# Altium PCB Drofnats.PcbDoc
Units mm, origin at the board's own origin, x right, y up, seen from the top; angles counter-clockwise.
Board outline 76.2 x 76.2 mm, 2 copper layers (Top Layer, Bottom Layer), stack 1.569 mm thick; 8 components, 12 nets, 36 pads, 18 vias.
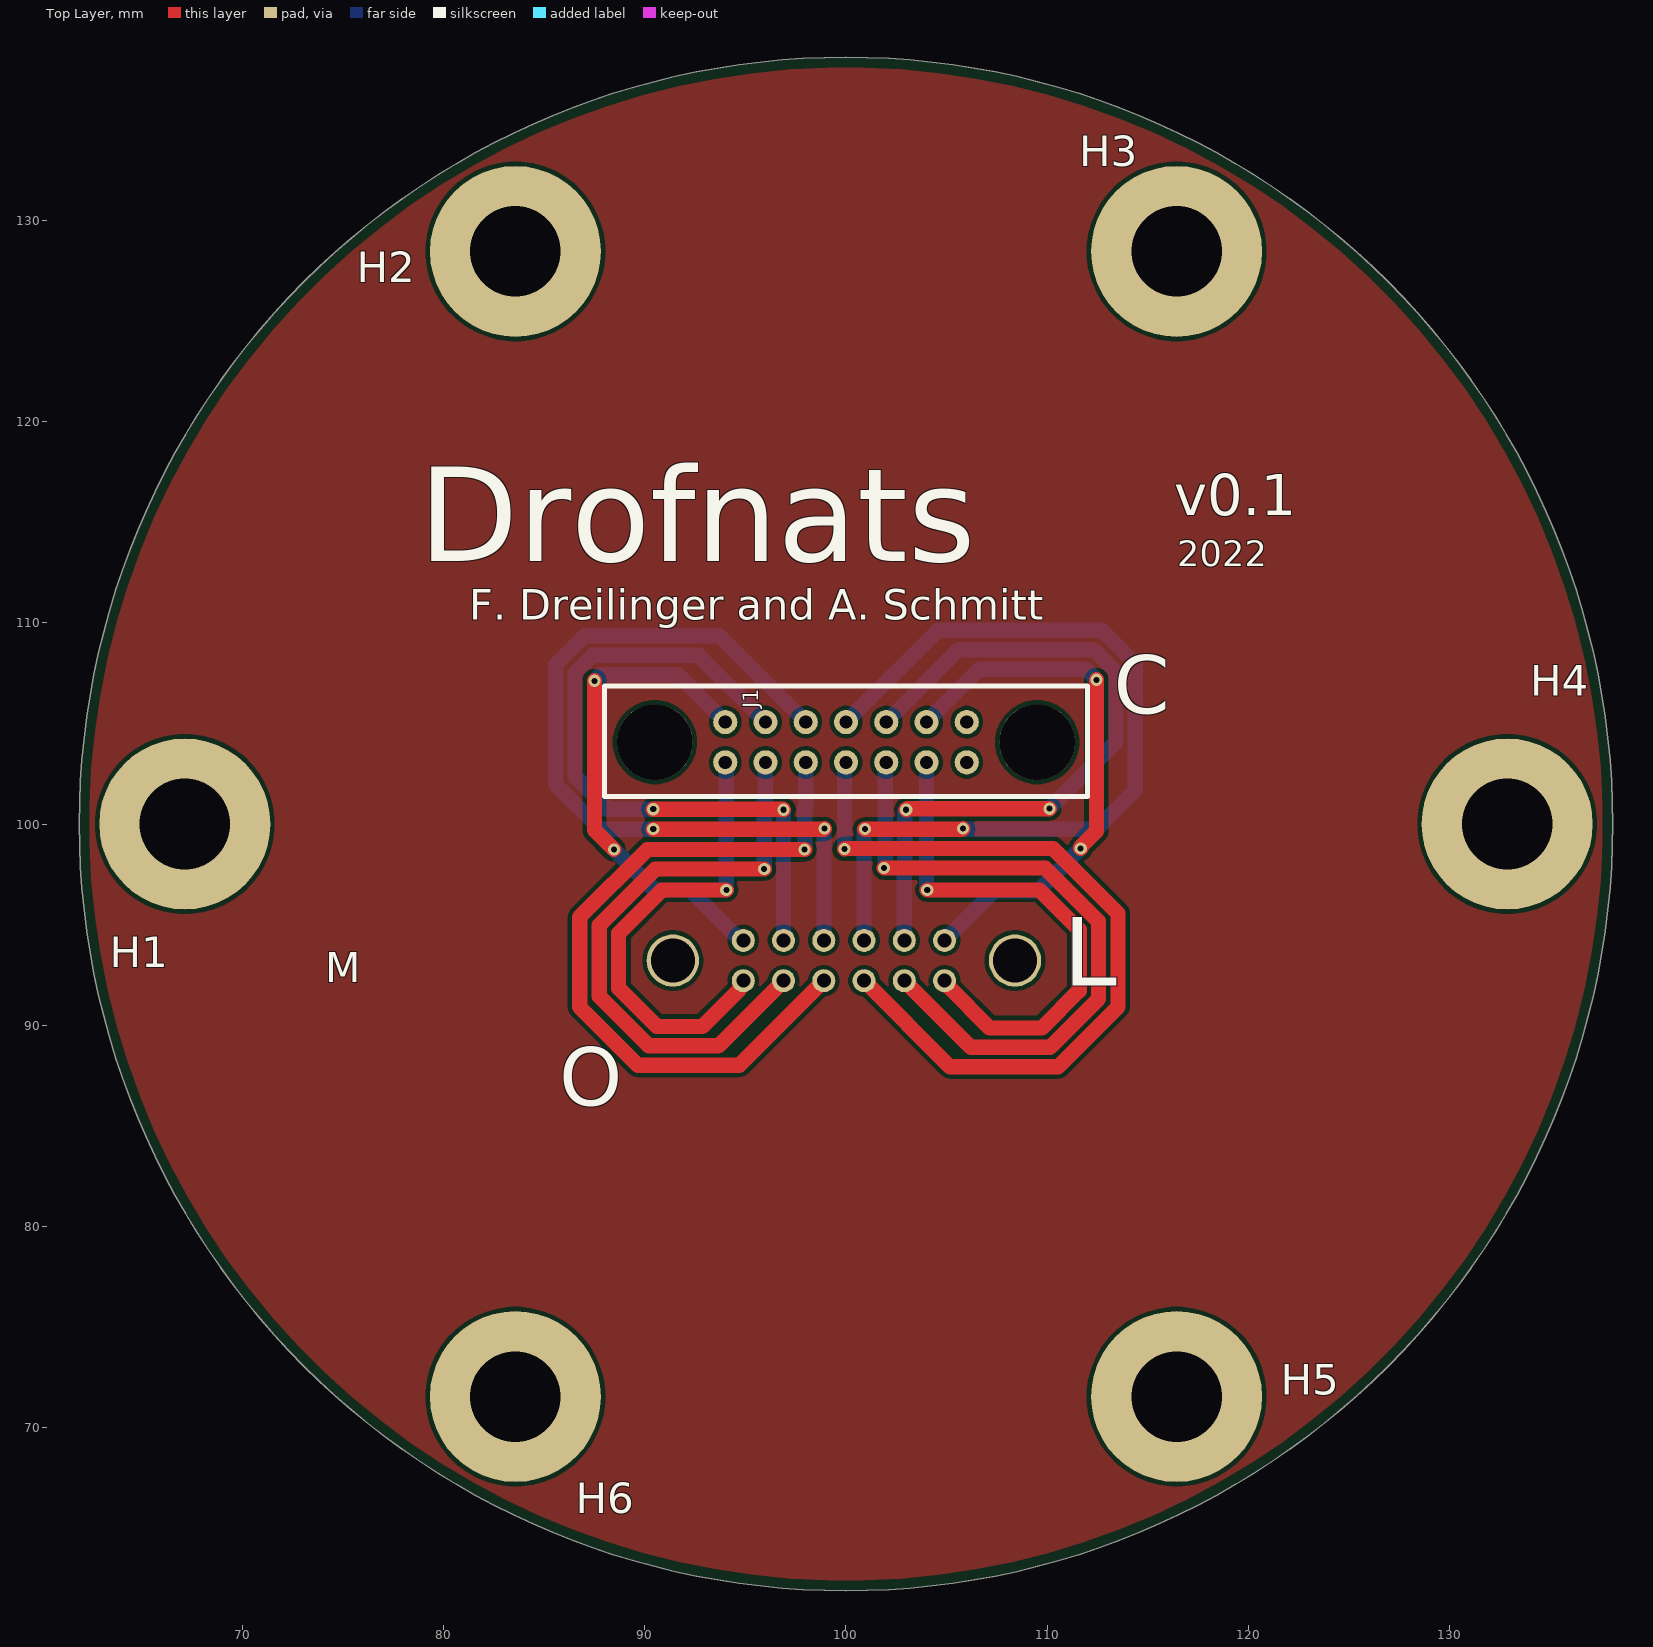
[diagram p0: Top Layer view]
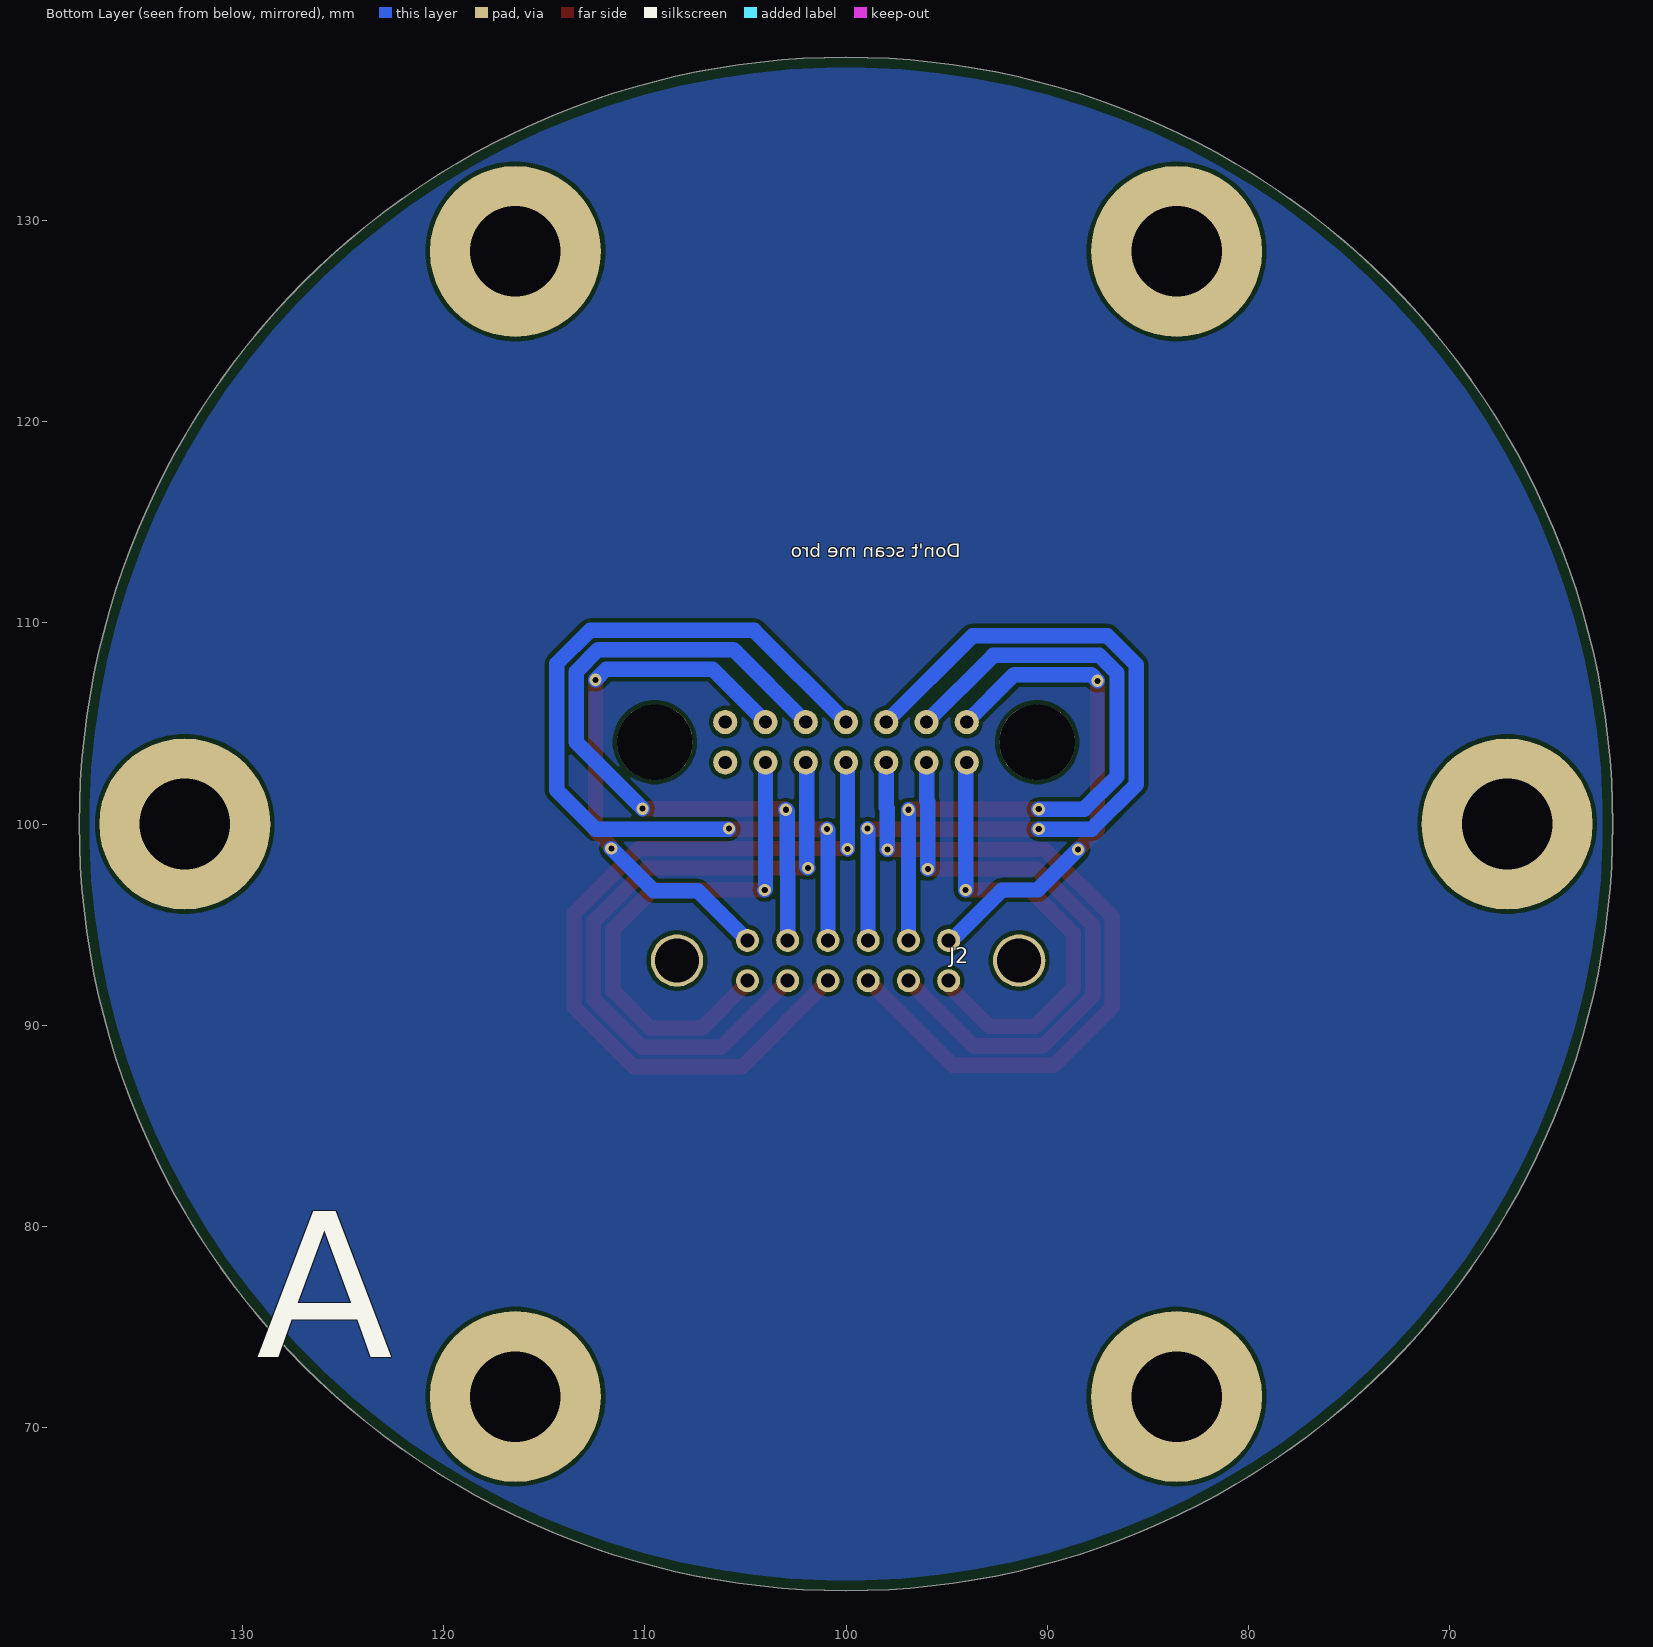
[diagram p1: Bottom Layer view, seen from below]

## Layer stack, top to bottom
Top Solder: solder mask 0.0254, SM-001, Dk 4
Top Layer: signal copper 0.035
Dielectric 1: core 1.4986, Core-043, Dk 4.3
Bottom Layer: signal copper 0.035
Bottom Solder: solder mask 0.0254, SM-001, Dk 4

## Board outline
100,61.9 cw(c100,100) 61.9,100 cw(c100,100) 100,138.1 cw(c100,100) 138.1,100 cw(c100,100)

## Design rules (kind name [scope] priority, off if disabled: settings)
BoardOutlineClearance [( Not OnLayer('Bottom Overlay')) AND ( Not OnLayer('Top Overlay'))] p1: gap=0.508 ignorepadtopadclearanceinfootprint=FALSE except(0: Arc-SplitContinuation Track-SplitContinuation SMDPad-SplitContinuation THPad-SplitContinuation Via-SplitContinuation Fill-SplitContinuation Poly-SplitContinuation Region-SplitContinuation Text-SplitContinuation)
Clearance [All] p1: gap=0.203 ignorepadtopadclearanceinfootprint=TRUE except(0: Arc-Hole Track-Hole SMDPad-Hole THPad-Hole Via-Hole Fill-Hole Poly-Hole Region-Hole Text-Hole; 0.152: Arc-Text Track-Text SMDPad-Text THPad-Text Via-Text Fill-Text Poly-Text Region-Text Text-Text)
DiffPairsRouting [All] p1: maxlimit=0.254 minlimit=0.127 mostfreqgap=0.254 toplayer_minwidth=0.127 toplayer_maxwidth=0.381 toplayer_prefwidth=0.254 bottomlayer_minwidth=0.127 bottomlayer_maxwidth=0.381 bottomlayer_prefwidth=0.254 maxuncoupledlength=12.7
HoleSize [All] p1: absolutevalues=TRUE maxlimit=25.4 minlimit=0.254 maxpercent=80.000 minpercent=20.000
MinimumAnnularRing [All] p1: minimumring=0.152
MinimumSolderMaskSliver [All] p1: minsoldermaskwidth=0
PlaneConnect [All] p1: planeconnectstyle=Direct reliefexpansion=0.508 reliefentries=4 reliefconductorwidth=0.254 reliefairgap=0.254
PolygonConnect PolygonConnect_3 [All vs IsNamedPolygon('BOTTOM_GND')] p1: thpad.connectstyle=Direct thpad.reliefconductorwidth=0.254 thpad.reliefentries=4 thpad.polygonreliefangle="90 Angle" thpad.airgapwidth=0.254 smdpad.connectstyle=Relief smdpad.reliefconductorwidth=0.254 smdpad.reliefentries=4 smdpad.polygonreliefangle="90 Angle" smdpad.airgapwidth=0.254 via.connectstyle=Relief via.reliefconductorwidth=0.254 via.reliefentries=4 via.polygonreliefangle="90 Angle" via.airgapwidth=0.254
PolygonConnect PolygonConnect_2 [All vs IsNamedPolygon('NONET_L02_P012')] p2: thpad.connectstyle=Direct thpad.reliefconductorwidth=0.254 thpad.reliefentries=4 thpad.polygonreliefangle="90 Angle" thpad.airgapwidth=0.254 smdpad.connectstyle=Relief smdpad.reliefconductorwidth=0.254 smdpad.reliefentries=4 smdpad.polygonreliefangle="90 Angle" smdpad.airgapwidth=0.254 via.connectstyle=Relief via.reliefconductorwidth=0.254 via.reliefentries=4 via.polygonreliefangle="90 Angle" via.airgapwidth=0.254
PolygonConnect PolygonConnect_1 [All vs IsNamedPolygon('TOP_GND')] p3: thpad.connectstyle=Direct thpad.reliefconductorwidth=0.254 thpad.reliefentries=4 thpad.polygonreliefangle="90 Angle" thpad.airgapwidth=0.254 smdpad.connectstyle=Relief smdpad.reliefconductorwidth=0.254 smdpad.reliefentries=4 smdpad.polygonreliefangle="90 Angle" smdpad.airgapwidth=0.254 via.connectstyle=Relief via.reliefconductorwidth=0.254 via.reliefentries=4 via.polygonreliefangle="90 Angle" via.airgapwidth=0.254
PolygonConnect [All] p4: connectstyle=Relief reliefconductorwidth=0.254 reliefentries=4 polygonreliefangle="90 Angle" airgapwidth=0.254
RoutingVias [All] p1: holewidth=0.305 width=0.61 viastyle="Through Hole" minholewidth=0.305 minwidth=0.61 maxholewidth=25.4 maxwidth=25.4
SilkToSilkClearance [All] p1: silktosilkclearance=0
SilkToSolderMaskClearance [IsPad] p1: minsilkscreentomaskgap=0 clearancetoexposedcopper=TRUE
SolderMaskExpansion [All] p1: expansion=0.102 istentingtop=FALSE
UnRoutedNet [All] p1: checkbadconnections=TRUE
Width [All] p1: maxlimit=25.4 minlimit=0.152 preferedwidth=0.254 bottomlayer_prefwidth=0.152 minimp=50.000000 maximp=50.000000 favimp=50.000000 checkconnectedcopper=TRUE
23 further rules are at their usual default settings.

## Components (designator, comment, footprint, x,y, rotation, side; value= is the part's Value field where it differs from the comment)
H1 "SCREW_M4_PAN_PHILLIPS" SCREW_M4 67.147,100 r0 top
H2 "SCREW_M4_PAN_PHILLIPS" SCREW_M4 83.574,128.451 r0 top
H3 "SCREW_M4_PAN_PHILLIPS" SCREW_M4 116.426,128.451 r0 top
H4 "SCREW_M4_PAN_PHILLIPS" SCREW_M4 132.853,100 r0 top
H5 "SCREW_M4_PAN_PHILLIPS" SCREW_M4 116.426,71.549 r0 top
H6 "SCREW_M4_PAN_PHILLIPS" SCREW_M4 83.574,71.549 r0 top
J1 "HARWIN_FEM_VERT_M80-4001442" HARWIN_M80-4001442 100,104.064 r0 top
J2 "Harwin M80-5T11242ME" HARWIN-M80-5T11242ME 99.898,93.216 r180 bottom

## Footprints (in the part's own frame and the unit in brackets; to place one, negate y for a bottom-side part, rotate by r counter-clockwise, add the part's x,y. Pads: shape width x height; smd on the part's side, far side on the other; paste and mask are expansions set on the pad)
HARWIN-M80-5T11242ME [mil] "Harwin 5+5 Pos. Male DIL Horizontal Throughboard Conn. Jackscrews"
  round 102.36 hole 86.61: 0(-334.65,0) 0(334.65,0)
  round 45 hole 27.5: 1(196.85,39.37) 2(118.11,39.37) 3(39.37,39.37) 4(-39.37,39.37) 5(-118.11,39.37) 6(-196.85,39.37) 7(-196.85,-39.37) 8(-118.11,-39.37) 9(-39.37,-39.37) 10(39.37,-39.37) 11(118.11,-39.37) 12(196.85,-39.37)
  body extent -433,-115 433,123, height 224
HARWIN_M80-4001442 [mm] "Power to the Board 7+7 POS FEM +J/S 3mm TAIL TIN"
  round 1.2 hole 0.65: 1(-6,1) 2(-4,1) 3(-2,1) 4(0,1) 5(2,1) 6(4,1) 7(6,1) 8(6,-1) 9(4,-1) 10(2,-1) 11(0,-1) 12(-2,-1) 13(-4,-1) 14(-6,-1)
  round 3.75 hole 3.75: 15(-9.5,0) 15(9.5,0)
  silkscreen extent -12,-2.7 12,2.8, body extent -12,-2.78 12,2.77, height 5.63
SCREW_M4 [mm]
  round 8.5 hole 4.5: 1(0,0)

## Part data
H1 H2 H3 H4 H5 H6: library part CMP-054-0009-1, "MACHINE SCREW PAN PHILLIPS M4", Manufacturer="B&F Fastener Supply", Manufacturer Part Number="MPMS 004 0008 PH", ComponentLink1Description=Datasheet, ComponentLink1URL=http://www.fasnetdirect.com/refguide/MetD7985a.pdf, Design Item ID=SCREW_M4_PAN_PHILLIPS, Drive Type=Phillips, Features=-, Head Diameter="0.308\" (7.82mm)", Head Height="0.120\" (3.05mm)", Length - Below Head="0.315\" (8.00mm)", Length - Overall="0.435\" (11.05mm)", Material=-, Plating=Zinc, Pricing 1="100=0.0756, 1000=0.06048 (USD)", RoHS="RoHS non-compliant", Screw Head Type="Pan Head", Source=mechanical.SchLib, Stock 1=2800, Thread Size=M4
J1: library part CMP-030-0080-1, "7+7 POS FEM +J/S 3mm TAIL TIN", Color=Black, Manufacturer=Harwin, Manufacturer Part Number=M80-4001442, ComponentLink1Description=https://datasheet.ciiva.com/8051/10217-8051606.pdf, ComponentLink1URL=https://datasheet.ciiva.com/8051/10217-8051606.pdf, ComponentLink2Description=https://datasheet.ciiva.com/11749/0900766b80da66b3-11749902.pdf, ComponentLink2URL=https://datasheet.ciiva.com/11749/0900766b80da66b3-11749902.pdf, ComponentLink3Description=https://datasheet.ciiva.com/9480/m80-400-9480223.pdf, ComponentLink3URL=https://datasheet.ciiva.com/9480/m80-400-9480223.pdf, Connector Type=Receptacle, Contact Finish=Gold, Contact Finish Thickness="12µin (0.30µm)", Contact Type="Female Socket", Design Item ID=HARWIN_FEM_VERT_M80-4001442, Family="Rectangular Connectors - Headers, Receptacles, Female Sockets", Fastening Type=-, Features=Jackscrews, Mounting Type="Through Hole", Number of Positions=14, Number of Positions Loaded=All, Number of Rows=2, Packaging=Tube, Pitch="0.079\" (2.00mm)", Pricing 1="1=12.82, 10=11.66, 50=10.49, 100=9.91, 1000=7.75, 10000=7.75 (USD)", Row Spacing="0.079\" (2.00mm)", Series="Datamate J-Tek", Source=connector.SchLib, Stock 1=66, Termination=Solder
J2: library part CMP-00034-5, "6+6 Pos. Male DIL Vertical Throughboard Conn. 101Lok"

## Via types
v1: diameter 0.61, hole 0.305, Top Layer to Bottom Layer, 18 vias

## Nets (pads, with @x,y where several pads share a name; then routed paths per layer and width w, separated by ;. In a path a pad name is that pad's centre, name@x,y a point inside that pad or via, vN(x,y) a via of type N, cw(c..) or ccw(c..) an arc to the next point about the centre after c; other vN are vias at no path point)
DROUGE_+: J1.2 J2.2 | length 33.9
  Top Layer w0.762: v1(90.424,100.737) 96.873,100.737 v1(96.898,100.711)
  Bottom Layer w0.762: v1(90.424,100.737) 88.164,100.737 86.538,102.362 86.538,107.512 87.408,108.382 92.682,108.382 J1.2 ; J2.2 v1(96.898,100.711)
DROUGE_-: J1.13 J2.11 | length 29.7
  Top Layer w0.762: v1(95.933,97.765) 90.528,97.765 87.732,94.969 87.732,91.447 90.202,88.977 93.659,88.977 96.864,92.182 J2.11@96.864,92.216
  Bottom Layer w0.762: v1(95.933,97.765) 95.933,101.111 95.984,101.162 95.984,102.862 96,102.878 J1.13
MAIN_+: J1.1 J2.1 | length 24.8
  Top Layer w0.762: v1(87.503,107.112) 87.503,99.695 v1(88.468,98.73)
  Bottom Layer w0.762: v1(87.503,107.112) 87.808,107.417 91.648,107.417 J1.1 ; v1(88.468,98.73) 90.475,96.724 92.253,96.724 94.57,94.406 94.605,94.406 J2.1@94.945,94.066
MAIN_-: J1.14 J2.12 | length 23.4
  Top Layer w0.762: v1(94.056,96.724) 90.852,96.724 88.697,94.569 88.697,91.847 90.602,89.942 92.863,89.942 94.708,91.787 94.708,91.922 94.898,92.113 J2.12
  Bottom Layer w0.762: J1.14 94.056,103.008 v1(94.056,96.724)
SQB_HI_1A: J1.3 J2.3 | length 40.6
  Top Layer w0.762: v1(90.424,99.746) 98.908,99.746 v1(98.933,99.771)
  Bottom Layer w0.762: v1(90.424,99.746) 87.789,99.746 85.573,101.963 85.573,107.912 87.008,109.347 93.717,109.347 J1.3 ; J2.3 98.898,94.383 98.908,94.392 98.908,99.746 v1(98.933,99.771)
SQB_HI_1B: J1.4 J2.4 | length 43
  Top Layer w0.762: v1(100.94,99.746) 105.791,99.746 v1(105.816,99.771)
  Bottom Layer w0.762: J1.4 104.562,109.626 112.713,109.626 114.376,107.963 114.376,101.679 112.443,99.746 v1@105.842,99.746 ; J2.4 100.898,99.705 v1(100.94,99.746)
SQB_HI_2A: J1.5 J2.5 | length 35.2
  Top Layer w0.762: v1(102.99,100.711) 103.041,100.762 v1(110.109,100.762)
  Bottom Layer w0.762: J1.5 105.597,108.661 112.313,108.661 113.411,107.563 113.411,104.064 v1(110.109,100.762) ; J2.5 102.898,97.506 102.914,97.522 102.914,100.635 v1(102.99,100.711)
SQB_HI_2B: J1.6 J2.6 | length 27.1
  Top Layer w0.762: v1(111.658,98.781) 111.658,98.857 112.446,99.644 v1(112.446,107.163)
  Bottom Layer w0.762: J1.6 106.632,107.696 111.913,107.696 v1(112.446,107.163) ; J2.6 107.371,96.689 109.567,96.689 v1(111.658,98.781)
SQB_LO_1A: J1.12 J2.10 | length 36.5
  Top Layer w0.762: v1(97.943,98.73) 90.128,98.73 86.766,95.368 86.766,90.907 89.662,88.011 94.694,88.011 J2.10
  Bottom Layer w0.762: v1(97.943,98.73) 97.943,100.771 97.993,100.821 J1.12@97.993,103.058
SQB_LO_1B: J1.11 J2.9 | length 39.5
  Top Layer w0.762: v1(99.924,98.755) 99.949,98.781 110.293,98.781 113.513,95.561 113.513,90.916 110.532,87.935 105.179,87.935 J2.9
  Bottom Layer w0.762: v1(99.924,98.755) 99.924,102.988 J1.11@99.975,103.039
SQB_LO_2A: J1.10 J2.8 | length 32.9
  Top Layer w0.762: v1(101.894,97.815) 109.894,97.815 112.547,95.162 112.547,91.315 110.132,88.9 106.214,88.9 102.933,92.182 J2.8@102.933,92.216
  Bottom Layer w0.762: v1(101.894,97.815) 101.949,97.871 101.949,103.013 J1.10
SQB_LO_2B: J1.9 J2.7 | length 26.2
  Top Layer w0.762: v1(104.039,96.724) 109.62,96.724 111.582,94.762 111.582,91.715 109.733,89.866 107.137,89.866 105.089,91.914 105.089,91.922 104.898,92.113 J2.7
  Bottom Layer w0.762: J1.9 104,96.762 v1(104.039,96.724)
pads on no net: H1.1 H2.1 H3.1 H4.1 H5.1 H6.1 J1.7 J1.8 J1.15 J2.0

## Polygon pours and split planes (outlines as drawn)
no net on Top Layer "NONET_L01_P019" (solid, pour order 19): 100,61.9 cw(c100,100) 61.9,100 cw(c100,100) 100,138.1 cw(c100,100) 138.1,100 cw(c100,100)
no net on Bottom Layer "NONET_L02_P020" (solid, pour order 20): 100,61.9 cw(c100,100) 61.9,100 cw(c100,100) 100,138.1 cw(c100,100) 138.1,100 cw(c100,100)

## Silkscreen, mask and mechanical layers (free items; w line width, h text height)
Top Overlay:
  text "v0.1" at 116.307,115.342 h2.03
  text "Drofnats" at 78.766,113.056 h4.7
  text "2022" at 116.459,112.801 h1.27
  text "F. Dreilinger and A. Schmitt" at 81.28,110.16 h1.5
  text "C" at 113.309,104.521 h5
  text "M" at 74.117,91.643 h2.54
  text "L" at 110.795,90.856 h6
  text "O" at 85.758,85.039 h5
  text "T" at 78.003,47.015 h50
Bottom Overlay:
  text "Don't scan me bro" at 94.31,113.021 h1.16
  text "A" at 129.292,70.711 h14.6
Bottom Solder:
  text "U" at 106.324,116.517 h15
Board Outline:
  circle w0.254: c100,100 r38.1